# Altium PCB module_board.PcbDoc
Units mm, origin at the board's own origin, x right, y up, seen from the top; angles counter-clockwise.
Board outline 65 x 64 mm, 2 copper layers (Top Layer, Bottom Layer); 56 components, 39 nets, 146 pads, 10 vias.
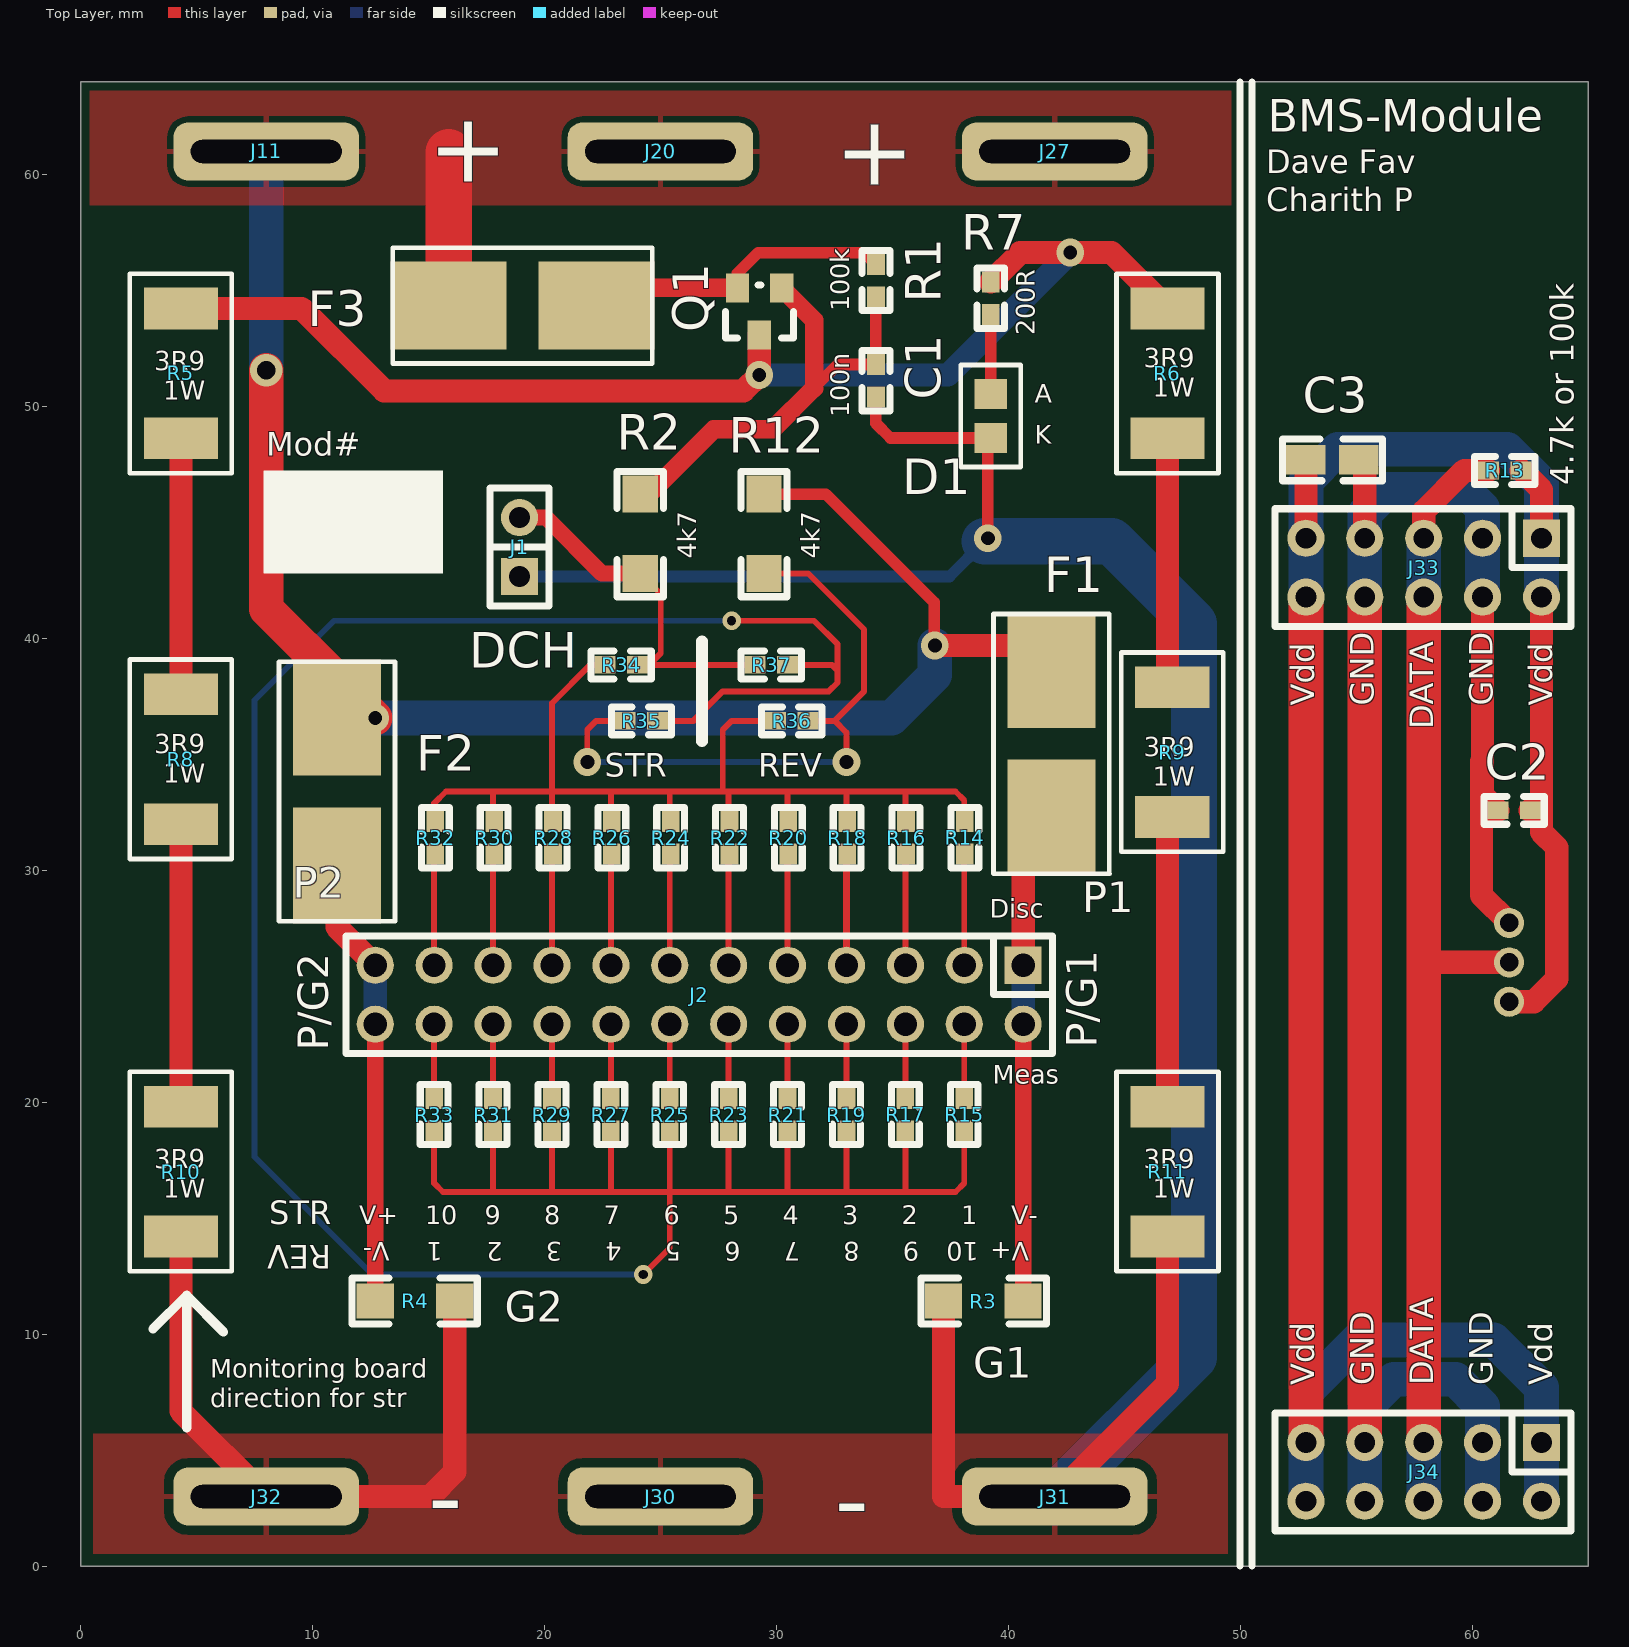
[diagram p0: Top Layer view]
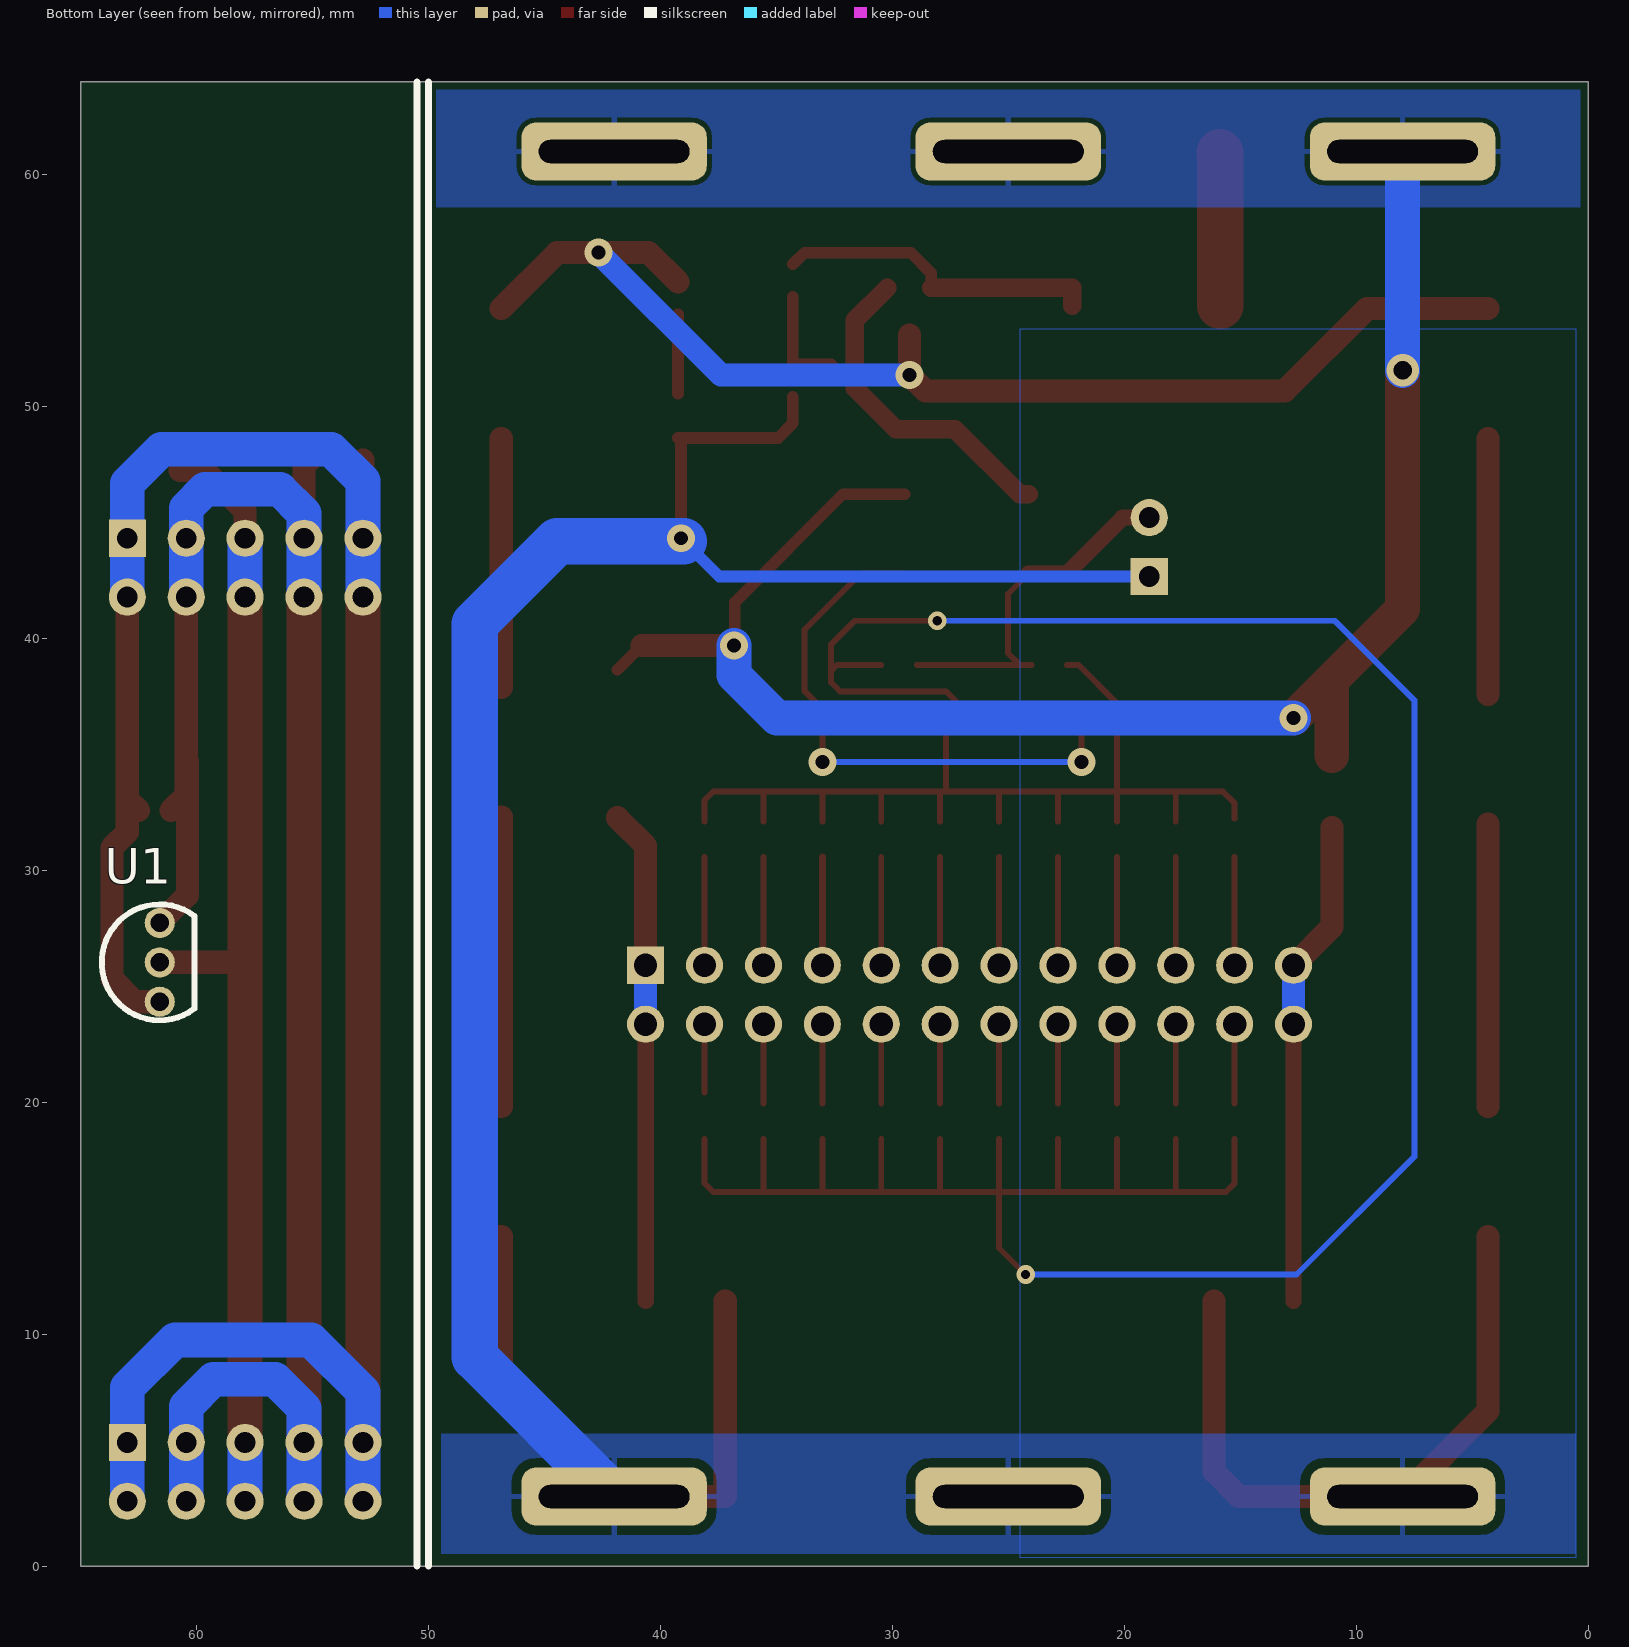
[diagram p1: Bottom Layer view, seen from below]

## Layer stack, top to bottom
Top Layer: signal copper 0.0356
Dielectric: core 0.32, FR-4, Dk 4.8
Bottom Layer: signal copper 0.0356

## Board outline
0,0 65,0 65,64 0,64

## Design rules (kind name [scope] priority, off if disabled: settings)
Clearance Clearance_1 [InNet('GND')] p1: gap=0.4
Clearance [All] p2: gap=0.2
MinimumSolderMaskSliver [All] p1 off: minsoldermaskwidth=0.254
PolygonConnect [All] p1: connectstyle=Relief reliefconductorwidth=0.254 reliefentries=4 polygonreliefangle="90 Angle"
RoutingVias [All] p1: holewidth=0.5 width=1.5 viastyle="Through Hole" minholewidth=0.4 minwidth=0.7 maxholewidth=3 maxwidth=1.5
SilkscreenOverComponentPads [All] p1 off: minsilkscreentomaskgap=0.254
SolderMaskExpansion [All] p1: expansion=0.102
Width [All] p1: maxlimit=3 minlimit=0.254 preferedwidth=0.254 minimp=50.000000 maximp=50.000000 favimp=50.000000
26 further rules are at their usual default settings.

## Components (designator, comment, footprint, x,y, rotation, side; value= is the part's Value field where it differs from the comment)
C1 "CAP" 0603 34.29,51.816 r270 top
C2 "100n" 0603 62.509,32.588 r180 top
C3 "1u" 0805 52.832,47.701 r0 top
D1 "LED" 0805LED 39.243,50.546 r270 top
F1 "POWER_FUSE" LITTELFUSE-154 41.859,35.458 r90 top
F2 "POWER_FUSE" LITTELFUSE-154 11.049,33.401 r90 top
F3 "FUSE" LITTELFUSE-154 19.05,54.356 r0 top
J1 "DCH" IDC2 18.923,42.672 r90 top
J2 "IDC24" IDC24 40.64,25.908 r180 top
J11 "Tab" tab_connect#1 3.429,65.786 r180 top
J20 "Tab" tab_connect#2 35.941,-15.621 r180 top
J27 "Tab" tab_connect#3 35.941,-21.463 r180 top
J30 "Tab" tab_connect#4 35.941,-32.512 r180 top
J31 "Tab" tab_connect#5 35.941,-26.797 r180 top
J32 "Tab" tab_connect#6 5.4,-12.573 r180 top
J33 "IDC10" IDC10 62.992,44.323 r180 top
J34 "IDC10" IDC10 62.992,5.334 r180 top
Q1 "MOSFET_P_Si2351DS" SOT23-3 30.226,55.118 r180 top
R1 "100k" 0603 34.29,54.737 r90 top
R2 "4.7k" 1206 24.13,42.799 r90 top
R3 "" 1206 40.64,11.43 r180 top
R4 "" 1206 12.7,11.43 r0 top
R5 "3R9" 2512 4.318,54.229 r270 top
R6 "3R9" 2512 46.863,54.229 r270 top
R7 "200r" 0603 39.243,55.372 r270 top
R8 "3R9" 2512 4.318,37.592 r270 top
R9 "3R9" 2512 47.066,37.897 r270 top
R10 "3R9" 2512 4.318,19.812 r270 top
R11 "3R9" 2512 46.863,19.812 r270 top
R12 "4.7k" 1206 29.464,42.799 r90 top
R13 "100k" 0603 60.706,47.244 r0 top
R14 "0k" 0603 38.125,30.709 r90 top
R15 "0k" 0603 38.1,18.771 r90 top
R16 "0k" 0603 35.588,30.709 r90 top
R17 "0k" 0603 35.56,18.771 r90 top
R18 "0k" 0603 33.051,30.709 r90 top
R19 "0k" 0603 33.02,18.771 r90 top
R20 "0k" 0603 30.514,30.709 r90 top
R21 "0k" 0603 30.48,18.771 r90 top
R22 "0k" 0603 27.977,30.709 r90 top
R23 "0k" 0603 27.94,18.771 r90 top
R24 "0k" 0603 25.44,30.709 r90 top
R25 "0k" 0603 25.4,18.771 r90 top
R26 "0k" 0603 22.902,30.709 r90 top
R27 "0k" 0603 22.86,18.771 r90 top
R28 "0k" 0603 20.365,30.709 r90 top
R29 "0k" 0603 20.32,18.771 r90 top
R30 "0k" 0603 17.828,30.709 r90 top
R31 "0k" 0603 17.78,18.771 r90 top
R32 "0k" 0603 15.291,30.709 r90 top
R33 "0k" 0603 15.24,18.771 r90 top
R34 "0k" 0603 24.001,38.862 r180 top
R35 "0k" 0603 23.481,36.449 r0 top
R36 "0k" 0603 29.958,36.449 r0 top
R37 "0k" 0603 30.478,38.862 r180 top
U1 "DS18B20" TO-92 61.595,26.035 r90 bottom

## Footprints (in the part's own frame and the unit in brackets; to place one, negate y for a bottom-side part, rotate by r counter-clockwise, add the part's x,y. Pads: shape width x height; smd on the part's side, far side on the other; paste and mask are expansions set on the pad)
0603 [mil]
  rect 35.43x30 smd: 1(0,0) 2(55,0)
  silkscreen extent -24,-24 79,24
0805 [mm]
  rect 1.7x1.27 smd: 1(0,0) 2(2.286,0)
  silkscreen extent -1,-0.9 3.3,0.9
0805LED [mm]
  rect 1.3x1.4 smd: A(0,0) K(1.9,0)
  silkscreen extent -1.25,-1.3 3.15,1.3
1206 [mil]
  rect 62.99x60 smd: 1(0,0) 2(135,0)
  silkscreen extent -39,-39 173,39
2512 [mm]
  rect 1.8x3.2 smd: 1(0,0) 2(5.6,0)
  silkscreen extent -1.5,-2.2 7.1,2.2
IDC2 [mm]
  rect 1.6x1.6 hole 0.9: 1(0,0)
  round 1.6 hole 0.9: 2(2.54,0)
  silkscreen extent -1.27,-1.27 3.81,1.27
IDC10 [mm]
  rect 1.6x1.6 hole 0.9: 1(0,0)
  round 1.6 hole 0.9: 2(0,2.54) 3(2.54,0) 4(2.54,2.54) 5(5.08,0) 6(5.08,2.54) 7(7.62,0) 8(7.62,2.54) 9(10.16,0) 10(10.16,2.54)
  silkscreen extent -1.27,-1.27 11.5,3.81
IDC24 [mm]
  rect 1.6x1.6 hole 1: 1(0,0)
  round 1.6 hole 1: 2(0,2.54) 3(2.54,0) 4(2.54,2.54) 5(5.08,0) 6(5.08,2.54) 7(7.62,0) 8(7.62,2.54) 9(10.16,0) 10(10.16,2.54) 11(12.7,0) 12(12.7,2.54) 13(15.24,0) 14(15.24,2.54) 15(17.78,0) 16(17.78,2.54) 17(20.32,0) 18(20.32,2.54) 19(22.86,0) 20(22.86,2.54) 21(25.4,0) 22(25.4,2.54) 23(27.94,0) 24(27.94,2.54)
  silkscreen extent -1.27,-1.27 29.21,3.81
LITTELFUSE-154 [mm]
  rect 5x3.81 smd: 1(-3.185,0) 2(3.185,0)
  silkscreen extent -5.6,-2.51 5.6,2.5
SOT23-3 [mm]
  rect 1x1.25 smd: 1(0,0) 2(1.905,0) 3(0.965,2.032)
  silkscreen extent -0.51,-0.13 2.41,2.16
tab_connect#1 [mm]
  rrect50% 8x2.5 hole 1 slot 6.5 at 0 deg: 0(-4.571,4.786)
tab_connect#2 [mm]
  rrect50% 8x2.5 hole 1 slot 6.5 at 0 deg: 0(10.941,-76.621)
tab_connect#3 [mm]
  rrect50% 8x2.5 hole 1 slot 6.5 at 0 deg: 0(-6.059,-82.463)
tab_connect#4 [mm]
  rrect50% 8x2.5 hole 1 slot 6.5 at 0 deg: 0(10.941,-35.512)
tab_connect#5 [mm]
  rrect50% 8x2.5 hole 1 slot 6.5 at 0 deg: 0(-6.059,-29.797)
tab_connect#6 [mm]
  rrect50% 8x2.5 hole 1 slot 6.5 at 0 deg: 0(-2.6,-15.573)
TO-92 [mm]
  round 1.3 hole 0.8: 1(-1.7,0) 2(0,0) 3(1.7,0)
  silkscreen extent -2.5,-1.5 2.5,2.5

## Part data
C1: "Capacitor"
C2 C3: library part CAP, "Capacitor"
F1 F2: library part FUSE, "Fuse"
F3: "Fuse"
J1: library part CON2
J2 J33 J34: "Connector"
J11 J20 J27 J30 J31 J32: library part tab_connection
Q1: "Si2351DS P-Channel MOSFET"
R1 R2 R3 R4 R5 R6 R7 R8 R9 R10 R11 R12 R13 R14 R15 R16 R17 R18 R19 R20 R21 R22 R23 R24 R25 R26 R27 R28 R29 R30 R31 R32 R33 R34 R35 R36 R37: library part RES1, "Resistor"
U1: "DS18B20 1-Wire Temperature sensor"

## Via types
v1: diameter 1.2, hole 0.6, Top Layer to Bottom Layer, 7 vias
v2: diameter 0.8, hole 0.4, Top Layer to Bottom Layer, 2 vias
v3: diameter 1.4, hole 0.8, Top Layer to Bottom Layer, 1 vias

## Nets (pads, with @x,y where several pads share a name; then routed paths per layer and width w, separated by ;. In a path a pad name is that pad's centre, name@x,y a point inside that pad or via, vN(x,y) a via of type N, cw(c..) or ccw(c..) an arc to the next point about the centre after c; other vN are vias at no path point)
1-WIRE_DATA: J33.5 J33.6 J34.5 J34.6 R13.1 U1.2 | length 49.9
  Top Layer w1: 57.912,25.984 57.963,26.035 U1.2 ; J33.5 57.912,45.491 59.665,47.244 R13.1
  Top Layer w1.5: J34.5 57.912,25.984 J33.6
  Bottom Layer w1.5: J34.6 J34.5 ; J33.6 J33.5
1-WIRE_GND: C2.2 C3.2 J33.3 J33.4 J33.7 J33.8 J34.3 J34.4 J34.7 J34.8 U1.3 | length 84.3
  Top Layer w1: C3.2 55.372,47.447 J33.7 ; 60.401,34.696 60.401,28.929 U1.3 ; J33.4 60.452,33.249 C2.2
  Top Layer w1.5: J34.7 J33.8
  Bottom Layer w1.5: J34.8 J34.7 55.372,6.807 56.618,8.054 59.282,8.054 60.452,6.883 J34.3 J34.4 ; J33.8 J33.7 55.372,45.39 56.413,46.431 59.639,46.431 60.452,45.618 J33.3 J33.4
1-WIRE_VDD: C2.1 C3.1 J33.1 J33.2 J33.9 J33.10 J34.1 J34.2 J34.9 J34.10 R13.2 U1.1 | length 105.8
  Top Layer w1: J33.9 C3.1 ; U1.1 62.664,24.335 63.652,25.324 63.652,30.988 62.992,31.648 62.992,33.071 ; R13.2 62.154,47.244 62.992,46.406 J33.1 ; C2.1 62.992,33.071 ; J33.2 62.992,33.071
  Top Layer w1.5: J34.9 J33.10
  Bottom Layer w1.5: J34.10 J34.9 52.832,7.518 55.067,9.754 60.935,9.754 62.992,7.696 J34.1 J34.2 ; J33.10 J33.9 52.832,46.787 54.204,48.158 61.519,48.158 62.992,46.685 J33.1 J33.2
DISCHARGE_LOCAL: J1.2 R2.1 R34.1 R37.2 | length 15.7
  Top Layer w0.254: R34.1 R37.2@28.948,38.862 ; R2.1 25.011,41.918 25.011,39.362 24.511,38.862
  Top Layer w0.7: J1.2 20.066,45.212 22.479,42.799 R2.1
DISCHARGE_REMOTE: R14.2 R16.2 R18.2 R20.2 R22.2 R24.2 R26.2 R28.2 R30.2 R32.2 R34.2 R36.1 | length 47
  Top Layer w0.254: R32.2@15.24,32.226 15.24,32.893 15.748,33.401 17.78,33.401 ; R30.2@17.78,32.099 17.78,33.401 ; R28.2@20.32,32.099 20.32,33.401 ; R34.2@22.471,38.862 21.971,38.862 20.32,37.211 20.32,33.401 ; R26.2@22.86,32.099 22.86,33.401 ; R24.2@25.4,32.099 25.4,33.401 ; R22.2@27.94,32.099 27.94,33.401 ; R36.1 28.067,36.449 27.686,36.068 27.686,33.401 ; R20.2@30.48,32.099 30.48,33.401 ; R18.2@33.02,32.099 33.02,33.401 ; R16.2@35.56,32.099 35.56,33.401 ; R14.2@38.1,32.099 38.1,33.02 37.719,33.401 35.56,33.401 ; 17.78,33.401 20.32,33.401 ; 20.32,33.401 22.86,33.401 ; 22.86,33.401 25.4,33.401 ; 25.4,33.401 27.686,33.401 ; 27.686,33.401 27.94,33.401 ; 27.94,33.401 30.48,33.401 ; 30.48,33.401 33.02,33.401 ; 33.02,33.401 35.56,33.401
GND: C1.2 D1.K J1.1 J30.0 J31.0 J32.0 R3.2 R4.2 R10.2 R11.2 | length 137.3
  Top Layer w0.5: C1.2 34.29,49.276 34.92,48.646 D1.K 39.116,48.519 v1(39.116,44.323)
  Top Layer w1: R10.2 4.318,6.682 J32.0 15.065,3 16.129,4.064 R4.2 ; R3.2 37.211,3 J31.0 46.863,7.863 R11.2
  Bottom Layer w0.5: J1.1 37.465,42.672 38.989,44.196 v1(39.116,44.323)
  Bottom Layer w2: v1@38.989,44.196 44.45,44.196 48.006,40.64 48.006,9.006 J31.0
MEASURE_LOCAL: R12.1 R35.1 R36.2 | length 27.2
  Top Layer w0.254: v1(21.844,34.671) 21.844,36.068 22.225,36.449 R35.1 ; R12.1 31.369,42.799 33.782,40.386 33.782,37.719 32.512,36.449 ; R36.2@31.488,36.449 32.512,36.449 ; v1(33.02,34.671) 33.02,35.941 32.512,36.449
  Bottom Layer w0.254: v1(21.844,34.671) v1(33.02,34.671)
MEASURE_REMOTE: R15.1 R17.1 R19.1 R21.1 R23.1 R25.1 R27.1 R29.1 R31.1 R33.1 R35.2 R37.1 | length 127
  Top Layer w0.254: R33.1@15.24,18.409 15.24,16.51 15.621,16.129 20.32,16.129 ; 17.78,16.129 R31.1@17.78,18.409 ; R29.1@20.32,18.409 20.32,16.129 ; R27.1@22.86,18.409 22.86,16.129 ; v2(24.257,12.573) 25.4,13.716 25.4,16.129 ; R35.2@25.011,36.449 26.416,36.449 27.686,37.719 32.258,37.719 32.639,38.1 32.639,38.608 ; R25.1@25.4,18.409 25.4,16.129 ; R23.1@27.94,18.409 27.94,16.129 ; v2(28.067,40.767) 31.623,40.767 32.639,39.751 32.639,38.608 ; R37.1 32.385,38.862 32.639,38.608 ; R21.1@30.48,18.409 30.48,16.129 ; R19.1@33.02,18.409 33.02,16.129 ; R17.1@35.56,18.409 35.56,16.129 ; R15.1@38.1,18.409 38.1,16.51 37.719,16.129 35.56,16.129 ; 20.32,16.129 22.86,16.129 ; 22.86,16.129 25.4,16.129 ; 25.4,16.129 27.94,16.129 ; 27.94,16.129 30.48,16.129 ; 30.48,16.129 33.02,16.129 ; 33.02,16.129 35.56,16.129
  Bottom Layer w0.254: v2(24.257,12.573) 12.573,12.573 7.493,17.653 7.493,37.338 10.922,40.767 v2(28.067,40.767)
NetC1_1: C1.1 Q1.1 R1.1 R2.2 | length 20.3
  Top Layer w0.5: 31.623,50.8 32.639,51.816 C1.1 R1.1
  Top Layer w0.8: R2.2 24.511,46.228 27.305,49.022 29.845,49.022 31.623,50.8 31.623,53.721 Q1.1
NetD1_A: D1.A R7.2 | length 3.4
  Top Layer w0.5: D1.A R7.2
NetJ2_3: J2.3 R14.1 | length 4.7
  Top Layer w0.254: J2.3 R14.1@38.1,30.569
NetJ2_4: J2.4 R15.2 | length 2.9
  Top Layer w0.254: R15.2@38.1,20.421 J2.4
NetJ2_5: J2.5 R16.1 | length 4.7
  Top Layer w0.254: J2.5 R16.1@35.56,30.569
NetJ2_6: J2.6 R17.2 | length 3.4
  Top Layer w0.254: R17.2@35.56,19.939 J2.6
NetJ2_7: J2.7 R18.1 | length 4.7
  Top Layer w0.3: J2.7 R18.1@33.02,30.569
NetJ2_8: J2.8 R19.2 | length 3.4
  Top Layer w0.254: R19.2@33.02,19.939 J2.8
NetJ2_9: J2.9 R20.1 | length 4.7
  Top Layer w0.254: J2.9 R20.1@30.48,30.569
NetJ2_10: J2.10 R21.2 | length 3.4
  Top Layer w0.254: R21.2@30.48,19.939 J2.10
NetJ2_11: J2.11 R22.1 | length 4.7
  Top Layer w0.254: J2.11 R22.1@27.94,30.569
NetJ2_12: J2.12 R23.2 | length 3.4
  Top Layer w0.254: R23.2@27.94,19.939 J2.12
NetJ2_13: J2.13 R24.1 | length 4.7
  Top Layer w0.254: J2.13 R24.1@25.4,30.569
NetJ2_14: J2.14 R25.2 | length 3.4
  Top Layer w0.254: R25.2@25.4,19.939 J2.14
NetJ2_15: J2.15 R26.1 | length 4.7
  Top Layer w0.254: J2.15 R26.1@22.86,30.569
NetJ2_16: J2.16 R27.2 | length 3.4
  Top Layer w0.254: R27.2@22.86,19.939 J2.16
NetJ2_17: J2.17 R28.1 | length 4.7
  Top Layer w0.254: J2.17 R28.1@20.32,30.569
NetJ2_18: J2.18 R29.2 | length 3.4
  Top Layer w0.254: R29.2@20.32,19.939 J2.18
NetJ2_19: J2.19 R30.1 | length 4.7
  Top Layer w0.254: J2.19 R30.1@17.78,30.569
NetJ2_20: J2.20 R31.2 | length 3.4
  Top Layer w0.254: R31.2@17.78,19.939 J2.20
NetJ2_21: J2.21 R32.1 | length 4.7
  Top Layer w0.254: J2.21 R32.1@15.24,30.569
NetJ2_22: J2.22 R33.2 | length 3.4
  Top Layer w0.254: R33.2@15.24,19.939 J2.22
NetQ1_3: Q1.3 R5.1 R6.1 R7.1 | length 53.2
  Top Layer w1: R5.1 9.525,54.229 13.081,50.673 28.575,50.673 v1(29.261,51.359) Q1.3 ; R7.1 40.513,56.642 v1(42.672,56.642) 44.45,56.642 R6.1
  Bottom Layer w1: v1(29.261,51.359) 37.389,51.359 v1(42.672,56.642)
NetR5_2: R5.2 R8.1 | length 11
  Top Layer w1: R8.1 R5.2
NetR6_2: R6.2 R9.1 | length 10.7
  Top Layer w1: R9.1@46.863,37.897 R6.2
NetR8_2: R8.2 R10.1 | length 12.2
  Top Layer w1: R10.1 R8.2
NetR9_2: R9.2 R11.1 | length 12.5
  Top Layer w1: R11.1 R9.2@46.863,32.297
POWER/GND_1: F1.1 J2.1 J2.2 R3.1 | length 21.3
  Top Layer w0.7: R3.1 J2.2
  Top Layer w1: J2.1 40.64,31.054 F1.1
  Bottom Layer w1: J2.2 J2.1
POWER/GND_2: F2.1 J2.23 J2.24 R4.1 | length 21.1
  Top Layer w0.7: R4.1 J2.24
  Top Layer w1: F2.1@11.049,31.851 11.049,27.559 J2.23
  Bottom Layer w1: J2.24 J2.23
VBAT: F1.2 F2.2 F3.1 J11.0 J20.0 J27.0 R12.2 | length 79
  Top Layer w0.5: R12.2 32.131,46.228 36.805,41.554 v1@36.805,39.7 ; F1.2@40.802,39.7 F1.2
  Top Layer w1: v1(36.83,39.7) F1.2@40.802,39.7
  Top Layer w1.5: v3(8,51.562) 8,41.276 F2.2@11.176,38.1 ; F2.2@11.049,34.951 11.049,37.973 F2.2@11.176,38.1 ; F2.2@12.674,36.576 v1(12.7,36.576) F2.2@11.176,38.1
  Top Layer w2: F3.1 15.865,60.95 15.875,60.96
  Bottom Layer w1.5: v3(8,51.562) J11.0 ; v1(12.7,36.576) 34.976,36.576 36.83,38.43 v1(36.83,39.7)
VFUSE: F3.2 Q1.2 R1.2 | length 14
  Top Layer w0.5: Q1.2 28.321,55.753 29.21,56.642 33.782,56.642 R1.2
  Top Layer w0.8: F3.2 22.235,55.118 Q1.2

## Polygon pours and split planes (outlines as drawn)
GND on Bottom Layer "GND_PLANE" (solid, shelved, pour order 2): 24.511,0.381 0.508,0.381 0.508,53.34 24.511,53.34 24.511,0.381
GND on Top Layer "Top_Neg" (solid, remove dead copper, pour order 9): 0.254,5.715 0.254,0.254 49.784,0.254 49.657,0.381 49.657,5.715
VBAT on Top Layer "Top_Pos" (solid, remove dead copper, pour order 7): 0.254,63.754 0.254,58.674 17.78,58.674 49.657,58.674 49.657,63.754
GND on Bottom Layer "Bot_Neg" (solid, remove dead copper, pour order 8): 0.254,5.715 0.254,0.254 49.784,0.254 49.657,0.381 49.657,5.715
VBAT on Bottom Layer "Bot_Pos" (solid, remove dead copper, pour order 6): 0.342,63.679 0.342,58.599 17.868,58.599 49.745,58.599 49.745,63.679

## Silkscreen, mask and mechanical layers (free items; w line width, h text height)
Top Overlay:
  rectangle: 7.874,42.799 15.621,47.244
  lines w0.3: 50,0 50,64 ; 50.5,0 50.5,64
  lines w0.4: 3.111,10.223 4.572,11.684 ; 4.572,5.969 4.572,11.684 ; 6.159,10.096 4.572,11.684
  lines w0.5: 26.789,35.56 26.789,39.878
  text "BMS-Module" at 51.181,61.849 h1.4
  text "Dave Fav" at 51.131,60.071 h1
  text "+" at 14.986,59.69 h3
  text "+" at 32.512,59.563 h3
  text "Charith P" at 51.131,58.42 h1
  text "100k" at 33.147,54.102 h0.8 r90
  text "200R" at 41.148,53.086 h0.8 r90
  text "3R9" at 45.847,51.689 h0.81
  text "3R9" at 3.175,51.562 h0.81
  text "1W" at 46.228,50.419 h0.81
  text "1W" at 3.556,50.292 h0.81
  text "A" at 41.148,50.165 h0.8
  text "100n" at 33.147,49.53 h0.8 r90
  text "K" at 41.148,48.387 h0.8
  text "Mod#" at 8.001,47.879 h1
  text "4.7k or 100k" at 64.389,46.609 h1 r90
  text "4k7" at 26.543,43.434 h0.8 r90
  text "4k7" at 31.877,43.434 h0.8 r90
  text "Vdd" at 53.188,37.093 h1 r90
  text "GND" at 55.753,37.093 h1 r90
  text "GND" at 60.884,37.093 h1 r90
  text "Vdd" at 63.449,37.093 h1 r90
  text "DATA" at 58.318,36.093 h1 r90
  text "3R9" at 3.175,35.052 h0.81
  text "3R9" at 45.847,34.925 h0.81
  text "STR" at 22.606,34.036 h1
  text "REV" at 29.21,34.036 h1
  text "1W" at 3.556,33.782 h0.81
  text "1W" at 46.228,33.655 h0.81
  text "P2" at 9.144,28.829 h1.3
  text "P1" at 43.18,28.194 h1.3
  text "Disc" at 39.192,27.965 h0.8
  text "P/G1" at 43.815,22.352 h1.3 r90
  text "P/G2" at 10.668,22.225 h1.3 r90
  text "Meas" at 39.319,20.803 h0.8
  text "3R9" at 3.175,17.145 h0.81
  text "3R9" at 45.847,17.145 h0.81
  text "1W" at 3.556,15.875 h0.81
  text "1W" at 46.228,15.875 h0.81
  text "STR" at 8.128,14.732 h1
  text "V+" at 12.002,14.732 h0.8
  text "10" at 14.859,14.732 h0.8
  text "9" at 17.427,14.732 h0.8
  text "8" at 19.995,14.732 h0.8
  text "7" at 22.564,14.732 h0.8
  text "6" at 25.132,14.732 h0.8
  text "5" at 27.7,14.732 h0.8
  text "4" at 30.268,14.732 h0.8
  text "3" at 32.837,14.732 h0.8
  text "2" at 35.405,14.732 h0.8
  text "1" at 37.973,14.732 h0.8
  text "V-" at 40.132,14.732 h0.8
  text "V-" at 13.335,13.97 h0.8 r180
  text "1" at 15.621,13.97 h0.8 r180
  text "2" at 18.189,13.97 h0.8 r180
  text "3" at 20.757,13.97 h0.8 r180
  text "4" at 23.326,13.97 h0.8 r180
  text "5" at 25.894,13.97 h0.8 r180
  text "6" at 28.462,13.97 h0.8 r180
  text "7" at 31.03,13.97 h0.8 r180
  text "8" at 33.599,13.97 h0.8 r180
  text "9" at 36.167,13.97 h0.8 r180
  text "10" at 38.735,13.97 h0.8 r180
  text "V+" at 40.894,13.97 h0.8 r180
  text "REV" at 10.795,13.843 h1 r180
  text "G2" at 18.288,10.541 h1.3
  text "Monitoring board" at 5.588,8.128 h0.8
  text "G1" at 38.481,8.128 h1.3
  text "Vdd" at 53.188,7.798 h1 r90
  text "GND" at 55.753,7.798 h1 r90
  text "DATA" at 58.318,7.798 h1 r90
  text "GND" at 60.884,7.798 h1 r90
  text "Vdd" at 63.449,7.798 h1 r90
  text "direction for str" at 5.588,6.858 h0.8
  text "-" at 14.986,1.524 h3
  text "-" at 32.512,1.397 h3
Bottom Overlay:
  lines w0.3: 50,0 50,64 ; 50.5,0 50.5,64
Mechanical 1:
  the board outline again, w0.254